# Altium PCB template.PcbDoc
Units mm, origin at the board's own origin, x right, y up, seen from the top; angles counter-clockwise.
Board outline 84 x 38.5 mm, 4 copper layers (Top Layer, Layer 2, Layer 3, Bottom Layer), stack 1.513 mm thick; 7 components, 6 nets, 32 pads, 0 vias.
Unrouted connection lines stored in the file: 18.
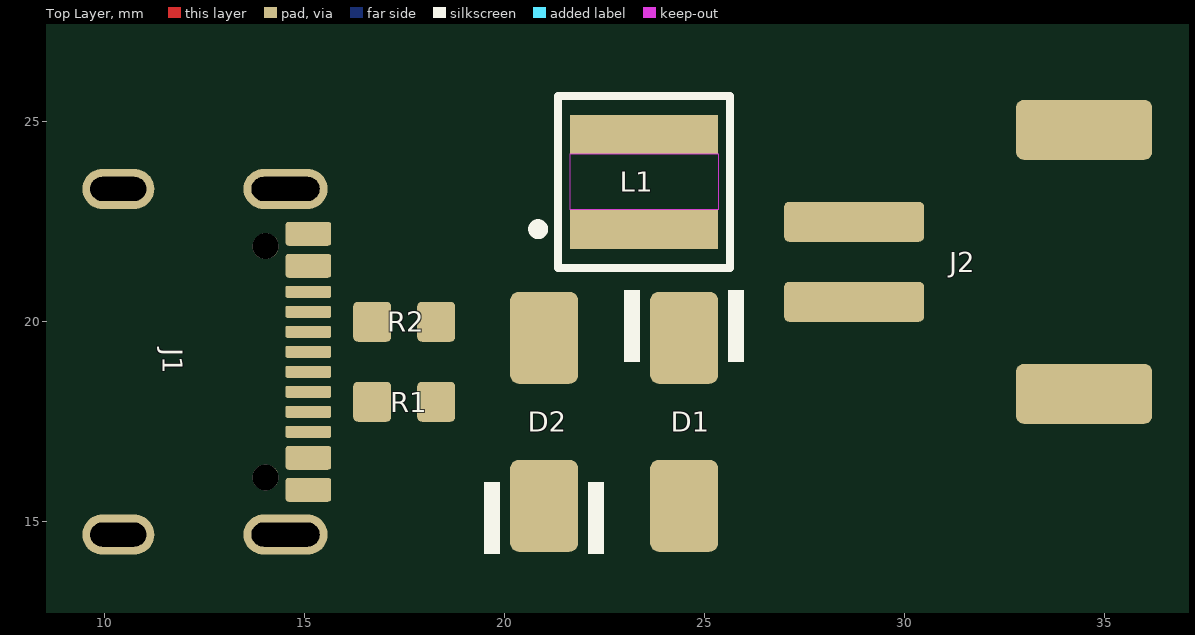
[diagram p0: Top Layer view]
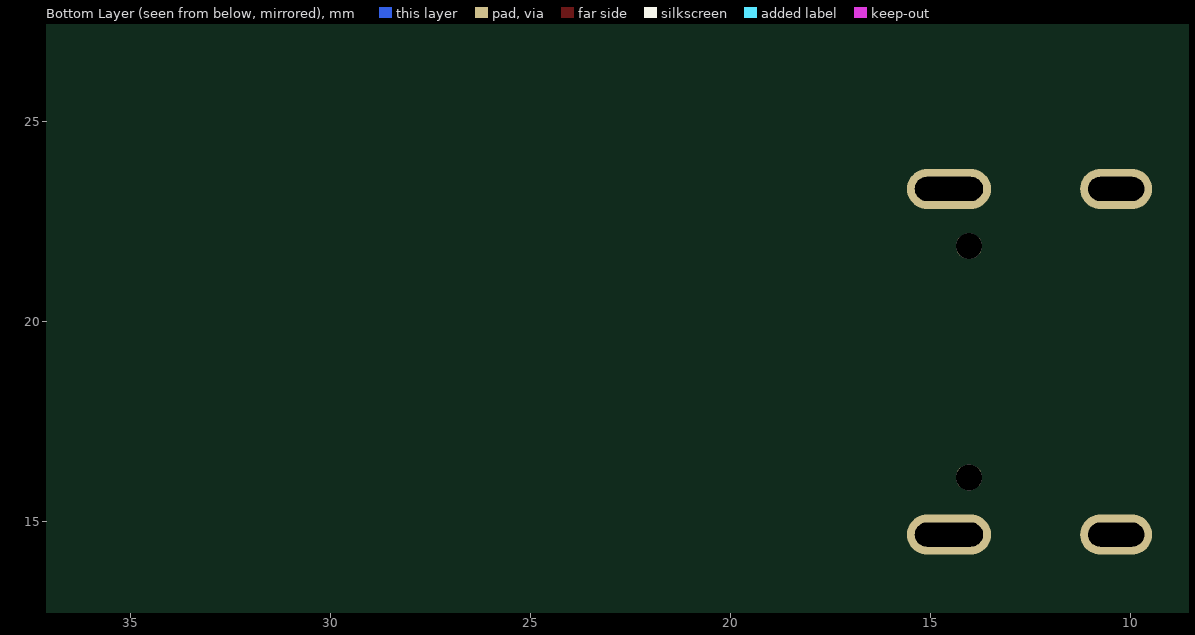
[diagram p1: Bottom Layer view, seen from below]

## Layer stack, top to bottom
Top Solder: solder mask 0.0254, SM-001, Dk 4
Top Layer: signal copper 0.035
Dielectric 2: prepreg 0.2083, PP-022, Dk 4.5
Layer 2: signal copper 0.018
Dielectric 3: core 0.9906, Core-042, Dk 4.6
Layer 3: signal copper 0.018
Dielectric 5: prepreg 0.2083, PP-022, Dk 4.5
Bottom Layer: signal copper 0.035
Bottom Solder: solder mask 0.0254, SM-001, Dk 4

## Board outline
6,0 6,38.5 90,38.5 90,0

## Design rules (kind name [scope] priority, off if disabled: settings)
BoardOutlineClearance [IsElectrical or IsPoly] p1: gap=0.4 ignorepadtopadclearanceinfootprint=FALSE
Clearance Clearance_NTPH_to_Track [IsTrack vs IsPad and IsThruPin and not PadIsPlated] p1: gap=0.254 ignorepadtopadclearanceinfootprint=TRUE
Clearance Clearance_TH_Pad_to_TH_Pad [IsPad and IsThruPin vs IsPad and IsThruPin] p2: gap=0.5 ignorepadtopadclearanceinfootprint=TRUE
Clearance Clearance_SMT_Pad_to_SMT_Pad [IsPad and IsSMTPin vs IsPad and IsSMTPin] p3: gap=0.127 ignorepadtopadclearanceinfootprint=TRUE
Clearance [All] p4: gap=0.2 ignorepadtopadclearanceinfootprint=FALSE except(0.127: SMDPad-SMDPad)
DiffPairsRouting DiffpairThermal [InDifferentialPair('K1') or InDifferentialPair('K2')] p1: maxlimit=0.254 minlimit=0.254 mostfreqgap=0.254 toplayer_minwidth=0.381 toplayer_maxwidth=0.381 toplayer_prefwidth=0.381 midlayer1_minwidth=0.381 midlayer1_maxwidth=0.381 midlayer1_prefwidth=0.381 midlayer2_minwidth=0.381 midlayer2_maxwidth=0.381 midlayer2_prefwidth=0.381 bottomlayer_minwidth=0.381 bottomlayer_maxwidth=0.381 bottomlayer_prefwidth=0.381 maxuncoupledlength=12.7
DiffPairsRouting USB_ext_layer_JLCPCB_4layer_7628 [InDifferentialPair('USB')] p2: maxlimit=0.35 minlimit=0.35 mostfreqgap=0.35 toplayer_minwidth=0.33 toplayer_maxwidth=0.33 toplayer_prefwidth=0.33 midlayer1_minwidth=0.33 midlayer1_maxwidth=0.33 midlayer1_prefwidth=0.33 midlayer2_minwidth=0.33 midlayer2_maxwidth=0.33 midlayer2_prefwidth=0.33 bottomlayer_minwidth=0.33 bottomlayer_maxwidth=0.33 bottomlayer_prefwidth=0.33 maxuncoupledlength=12.7
Height [not HasFootprint('PEC11R-4215F-S0024') and not HasFootprint('WS-TASV_L6W6H9.5_4301x20958x6') and ontop] p1: minheight=0 maxheight=6.5 prefheight=1
HoleSize NPTH_HoleSize [IsPad And not PadIsPlated] p1: absolutevalues=TRUE maxlimit=2.7 minlimit=0.2 maxpercent=80.000 minpercent=20.000
HoleSize Pad_HoleSize [IsPad] p2: absolutevalues=TRUE maxlimit=2.8 minlimit=0.5 maxpercent=80.000 minpercent=20.000
HoleSize Via_HoleSize [IsVia] p3: absolutevalues=TRUE maxlimit=6.3 minlimit=0.2 maxpercent=80.000 minpercent=20.000
HoleToHoleClearance [All] p1: gap=0.254 allowstackedmicrovias=FALSE
MatchedLengths USB [InDifferentialPair('USB')] p1: tolerance=0.15 checknetsindiffpair=TRUE checkdiffpairvsdiffpair=FALSE checkxsignals=FALSE checkothers=FALSE
MinimumAnnularRing [All] p1: minimumring=0.13
MinimumSolderMaskSliver [All] p1: minsoldermaskwidth=0.2
PolygonConnect [All] p1: thpad.connectstyle=Relief thpad.reliefconductorwidth=0.5 thpad.reliefentries=4 thpad.polygonreliefangle="90 Angle" thpad.airgapwidth=0.254 smdpad.connectstyle=Direct smdpad.reliefconductorwidth=0.5 smdpad.reliefentries=4 smdpad.polygonreliefangle="90 Angle" smdpad.airgapwidth=0.254 via.connectstyle=Direct via.reliefconductorwidth=0.5 via.reliefentries=4 via.polygonreliefangle="90 Angle" via.airgapwidth=0.254
RoutingVias [All] p1: holewidth=0.3 width=0.6 viastyle="Through Hole" minholewidth=0.2 minwidth=0.4 maxholewidth=0.711 maxwidth=1.27
SilkToSolderMaskClearance [IsPad] p1: minsilkscreentomaskgap=0.2 clearancetoexposedcopper=TRUE
SolderMaskExpansion SolderMaskExpansion_Via [IsVia] p1: expansion=0.102 istentingtop=TRUE
SolderMaskExpansion SolderMaskExpansion_notVia [not IsVia] p2: expansion=0.05 istentingtop=FALSE
Width [All] p1: maxlimit=2.54 minlimit=0.09 preferedwidth=0.25
24 further rules are at their usual default settings.

## Components (designator, comment, footprint, x,y, rotation, side; value= is the part's Value field where it differs from the comment)
D1 "B340AF-13" DO-214AC_UNI 24.5,17.5 r270 top
D2 "824500500" DO-214AC_UNI 21,17.5 r90 top
J1 "629722000214" 629722000214 11.5,19 r270 top
J2 "620102131822" 620102131822 30.5,21.5 r90 top
L1 "78438357100" WE-MAIA_4030 23.5,23.5 r90 top
R1 "Resistor 5.1k +/-1% 50V 0603" 0603-R-N 17.5,18 r0 top value=5.1k
R2 "Resistor 5.1k +/-1% 50V 0603" 0603-R-N 17.5,20 r0 top value=5.1k

## Footprints (in the part's own frame and the unit in brackets; to place one, negate y for a bottom-side part, rotate by r counter-clockwise, add the part's x,y. Pads: shape width x height; smd on the part's side, far side on the other; paste and mask are expansions set on the pad)
0603-R-N [mm]
  rrect25% 0.95x1 smd: 1(-0.8,0) 2(0.8,0)
  body extent -0.8,-0.4 0.8,0.4, height 0.47
620102131822 [mm] "2.00mm SMT Male Horizontal Shrouded Header, 2p"
  rrect25% 1x3.5 smd: 1(-1,1.75) 2(1,1.75)
  rrect25% 1.5x3.4 smd: MP1(-3.3,-4) MP2(3.3,-4)
  body extent -4,-5.6 4,3, height 5.57
629722000214 [mm] "USB TYPE C VERTICAL PLUG"
  rrect25% 0.6x1.14 smd: A4/B9(-2.4,3.605) A12/B1(3.2,3.605) B4/A9(2.4,3.605) B12/A1(-3.2,3.605)
  rrect25% 0.3x1.14 smd: A5(-1.25,3.605) A6(-0.25,3.605) A7(0.25,3.605) A8(1.25,3.605) B5(1.75,3.605) B6(0.75,3.605) B7(-0.75,3.605) B8(-1.75,3.605)
  round 0.65 hole 0.65 unplated: MH1(-2.89,2.535) MH2(2.89,2.535)
  oval 1x2.1 hole 0.6 slot 1.7 at 90 deg: S1(-4.32,3.035) S4(4.32,3.035)
  oval 1x1.8 hole 0.6 slot 1.4 at 90 deg: S2(-4.32,-1.145) S3(4.32,-1.145)
  body extent -4.79,-3.76 4.79,3.95, height 3.33
DO-214AC_UNI [mm] "SMA : 2-Leads. body 4.24x2.67mm"
  rrect25% 2.3x1.7 smd: 1(-2.1,0) 2(2.1,0)
  silkscreen extent -3.3,-1.5 -1.5,1.5, body extent -2.56,-1.33 2.56,1.34, height 2.24
WE-MAIA_4030 [mm] "SMD Power Inductor, 2-leads, body 4.1x4.1mm"
  rect 0.98x3.7 smd: 1(-1.185,0) 2(1.185,0)
  Top Layer keep-out region: -0.695,1.85 0.695,1.85 0.695,-1.85 -0.695,-1.85
  silkscreen extent -2.15,-2.15 2.15,2.77, body extent -2.05,-2.05 2.05,2.05, height 3.1

## Part data
D1: library part CMP-004-00050-4, "Diode 40 V 3A Surface Mount SMAF", Case/Package=SMA, Forward Current=3A, Forward Voltage="500 mV @ 3 A", JLCPCB Part #=C5310924, Max Reverse Voltage (DC)=40V, Mounting Technology="Surface Mount", Packaging="Cut Tape", RoHS Compliant=Yes, Series=-
D2: library part CMP-074-000038-8, "WE-TVSP SMT Power TVS Diode, DO-214AC, 400W, 5VDC, Unidirectional", (Reverse) Breakdown Voltage=6.7V, (Reverse) Peak Pulse Current=43.5A, Clamping Voltage=9.2V, DC Operating Voltage=5V, JLCPCB Part #=C2925443, Manufacturer="Wurth Elektronik", Operating Temperature="-65 to +150degC", Power Dissipation=400W, Component Type=Standard, ComponentLink1Description=Manufacturer, ComponentLink1URL=http://www.we-online.de, ComponentLink2Description=Datasheet, ComponentLink2URL=https://www.we-online.com/catalog/datasheet/824500500.pdf, Design Item ID=824500500, Manufacturer Part Number=824500500, Mounting Technology=SMT, Packaging="Tape and Reel", Pin Count=2, Polarity=Unidirectional, Published Date="July 2020", Size=DO-214AC, Source=WE-TVSP_DO-214AC_Unidirectional.SchLib
J1: library part CMP-088-000027-7, "WR-USB 2.0 Type C, Receptacle, Horizontal, SMT", JLCPCB Part #=C2982555, Manufacturer="Wurth Elektronik", Operating Temperature Max=85°C, Operating Temperature Min=-40°C, Rated Current=5A, Working Voltage=20VAC, Application="USB 2.0", Category="Input/Output Connectors", Component Type=Standard, ComponentLink1Description="Website Link", ComponentLink1URL=https://www.we-online.com/redexpert/article/629722000214?ad, ComponentLink2Description="Datasheet Link", ComponentLink2URL=https://www.we-online.com/redexpert/spec/629722000214?ad, Design Item ID=629722000214, Gender=Receptacle, Interface Type="Type C", Manufacturer Part Number=629722000214, Match Code=WR-USB, Mount="Surface Mount", Number of Pins=16, Number of Ports=1, Orientation=Horizontal, Packaging="Tape and Reel", Pin Count=13, Source=WR-USB.SchLib
J2: library part CMP-047-000040-11, "WR-WTB SMT Male Horizontal Shrouded Header, pitch 2mm, 2p", Contact Resistance=20mOhm, JLCPCB Part #=C295747, Operating Temperature="-25 to +85degC", Rated Current=2A, Withstanding Voltage=800VAC, Working Voltage=100VAC, Component Type=Standard, ComponentLink1Description=Manufacturer, ComponentLink1URL=http://www.we-online.de, ComponentLink2Description=Datasheet, ComponentLink2URL=https://www.we-online.com/catalog/datasheet/620102131822.pdf, Design Item ID=620102131822, Gender=Male, Mounting Technology=SMT, Packaging="Tape and Reel", Part Number=620102131822, Pin Count=2, Pin Number=2, Pitch=2mm, Published Date="January 2020", Publisher="Wurth Elektronik", Source=WR-WTB_2.00mm.SchLib, Type=Horizontal
L1: library part CMP-116-000112-1, "WE-MAIA SMT Power Inductor, size 4030, 10uH, 3.05A, 110mOhm", Case/Size Code=4030, DC Resistance Max=110mOhm, Inductance=10uH, Manufacturer="Wurth Elektronik", Operating Temperature Max=125°C, Operating Temperature Min=-40°C, Rated Current=3.05A, Saturation Current @ 10%=3A, Saturation Current @ 30%=5.95A, Self Resonant Frequency=15MHz, Automotive=Yes, Category="Power Inductors", Component Type=Standard, ComponentLink1Description="Website Link", ComponentLink1URL=https://www.we-online.com/redexpert/article/78438357100?ad, ComponentLink2Description="Datasheet Link", ComponentLink2URL=https://www.we-online.com/redexpert/spec/78438357100?ad, Design Item ID=78438357100, Height=3.1mm, Length=4.1mm, Manufacturer Part Number=78438357100, Match Code=WE-MAIA, Mount="Surface Mount", Packaging="Tape and Reel", Pin Count=2, Source=WE-MAIA.SchLib, Width=4.1mm
R1 R2: library part CMP-009-00192-17, "Chip Resistor, Thick Film, General Purpose, 0603, 100mW, 50V, 5.1 kOhm, +/-1%", Case/Package=0603, JLCPCB Part #=C144594, Max Operating Temperature=155°C, Min Operating Temperature=-55°C, Power Rating=100mW, Resistor Type="Thick Film", Temperature Coefficient=100ppm/°C, Tolerance=1%, Voltage Rating=50V, Elements=1, Mounting Technology=SMT, Pins=2, REACH SVHC="No SVHC", Usage="General Purpose"

## Nets (pads, with @x,y where several pads share a name; then routed paths per layer and width w, separated by ;. In a path a pad name is that pad's centre, name@x,y a point inside that pad or via, vN(x,y) a via of type N, cw(c..) or ccw(c..) an arc to the next point about the centre after c; other vN are vias at no path point)
GND: D2.2 J1.A12/B1 J1.B12/A1 J1.S1 J1.S2 J1.S3 J1.S4 J2.2 J2.MP1 J2.MP2 R1.2 R2.2
NetD1_1: D1.1 L1.1
NetD1_2: D1.2 D2.1 J1.A4/B9 J1.B4/A9
NetJ1_A5: J1.A5 R2.1
NetJ1_B5: J1.B5 R1.1
NetJ2_1: J2.1 L1.2
pads on no net: J1.A6 J1.A7 J1.A8 J1.B6 J1.B7 J1.B8 J1.MH1 J1.MH2

## Silkscreen, mask and mechanical layers (free items; w line width, h text height)
Fab Notes:
  drawing of 295 lines, arcs and shapes, not listed
  text "Soldermask color : green / Silkscreen color : white / Surface finish : Pb-free HASL / Via covering : tented / Board outline clearance : +/- 0.2mm" at 94,42 h6
  text "Layer" at 95.95,37.3 h1.5
  text "Name" at 106.298,37.3 h1.5
  text "Material" at 129.641,37.3 h1.5
  text "Thickness" at 144.738,37.3 h1.5
  text "Constant" at 161.084,37.3 h1.5
  text "Board Layer Stack" at 175.43,37.3 h1.5
  text "Top Overlay" at 106.298,34.3 h1.5
  text "Top Solder" at 106.298,31.3 h1.5
  text "SM-001" at 129.641,31.3 h1.5
  text "0.025mm" at 144.738,31.3 h1.5
  text "4" at 161.084,31.3 h1.5
  text "1" at 95.95,28.3 h1.5
  text "Top Layer" at 106.298,28.3 h1.5
  text "CF-004" at 129.641,28.3 h1.5
  text "0.035mm" at 144.738,28.3 h1.5
  text "Dielectric 2" at 106.298,25.3 h1.5
  text "PP-022" at 129.641,25.3 h1.5
  text "0.208mm" at 144.738,25.3 h1.5
  text "4.5" at 161.084,25.3 h1.5
  text "2" at 95.95,22.3 h1.5
  text "Layer 2" at 106.298,22.3 h1.5
  text "CF-003" at 129.641,22.3 h1.5
  text "0.018mm" at 144.738,22.3 h1.5
  text "Dielectric 3" at 106.298,19.3 h1.5
  text "Core-042" at 129.641,19.3 h1.5
  text "0.991mm" at 144.738,19.3 h1.5
  text "4.6" at 161.084,19.3 h1.5
  text "3" at 95.95,16.3 h1.5
  text "Layer 3" at 106.298,16.3 h1.5
  text "CF-003" at 129.641,16.3 h1.5
  text "0.018mm" at 144.738,16.3 h1.5
  text "Dielectric 5" at 106.298,13.3 h1.5
  text "PP-022" at 129.641,13.3 h1.5
  text "0.208mm" at 144.738,13.3 h1.5
  text "4.5" at 161.084,13.3 h1.5
  text "4" at 95.95,10.3 h1.5
  text "Bottom Layer" at 106.298,10.3 h1.5
  text "CF-004" at 129.641,10.3 h1.5
  text "0.035mm" at 144.738,10.3 h1.5
  text "Bottom Solder" at 106.298,7.3 h1.5
  text "SM-001" at 129.641,7.3 h1.5
  text "0.025mm" at 144.738,7.3 h1.5
  text "4" at 161.084,7.3 h1.5
  text "Bottom Overlay" at 106.298,4.3 h1.5
  text "Total board thickness:" at 95.95,1.3 h1.5
  text "1.564mm" at 144.738,1.3 h1.5